# Altium PCB motor.PcbDoc
Units mm, origin at the board's own origin, x right, y up, seen from the top; angles counter-clockwise.
Board outline 85 x 80 mm, 4 copper layers (Top Layer, Gnd, DC Power, Bottom Layer), stack 1.782 mm thick; 124 components, 69 nets, 364 pads, 102 vias.
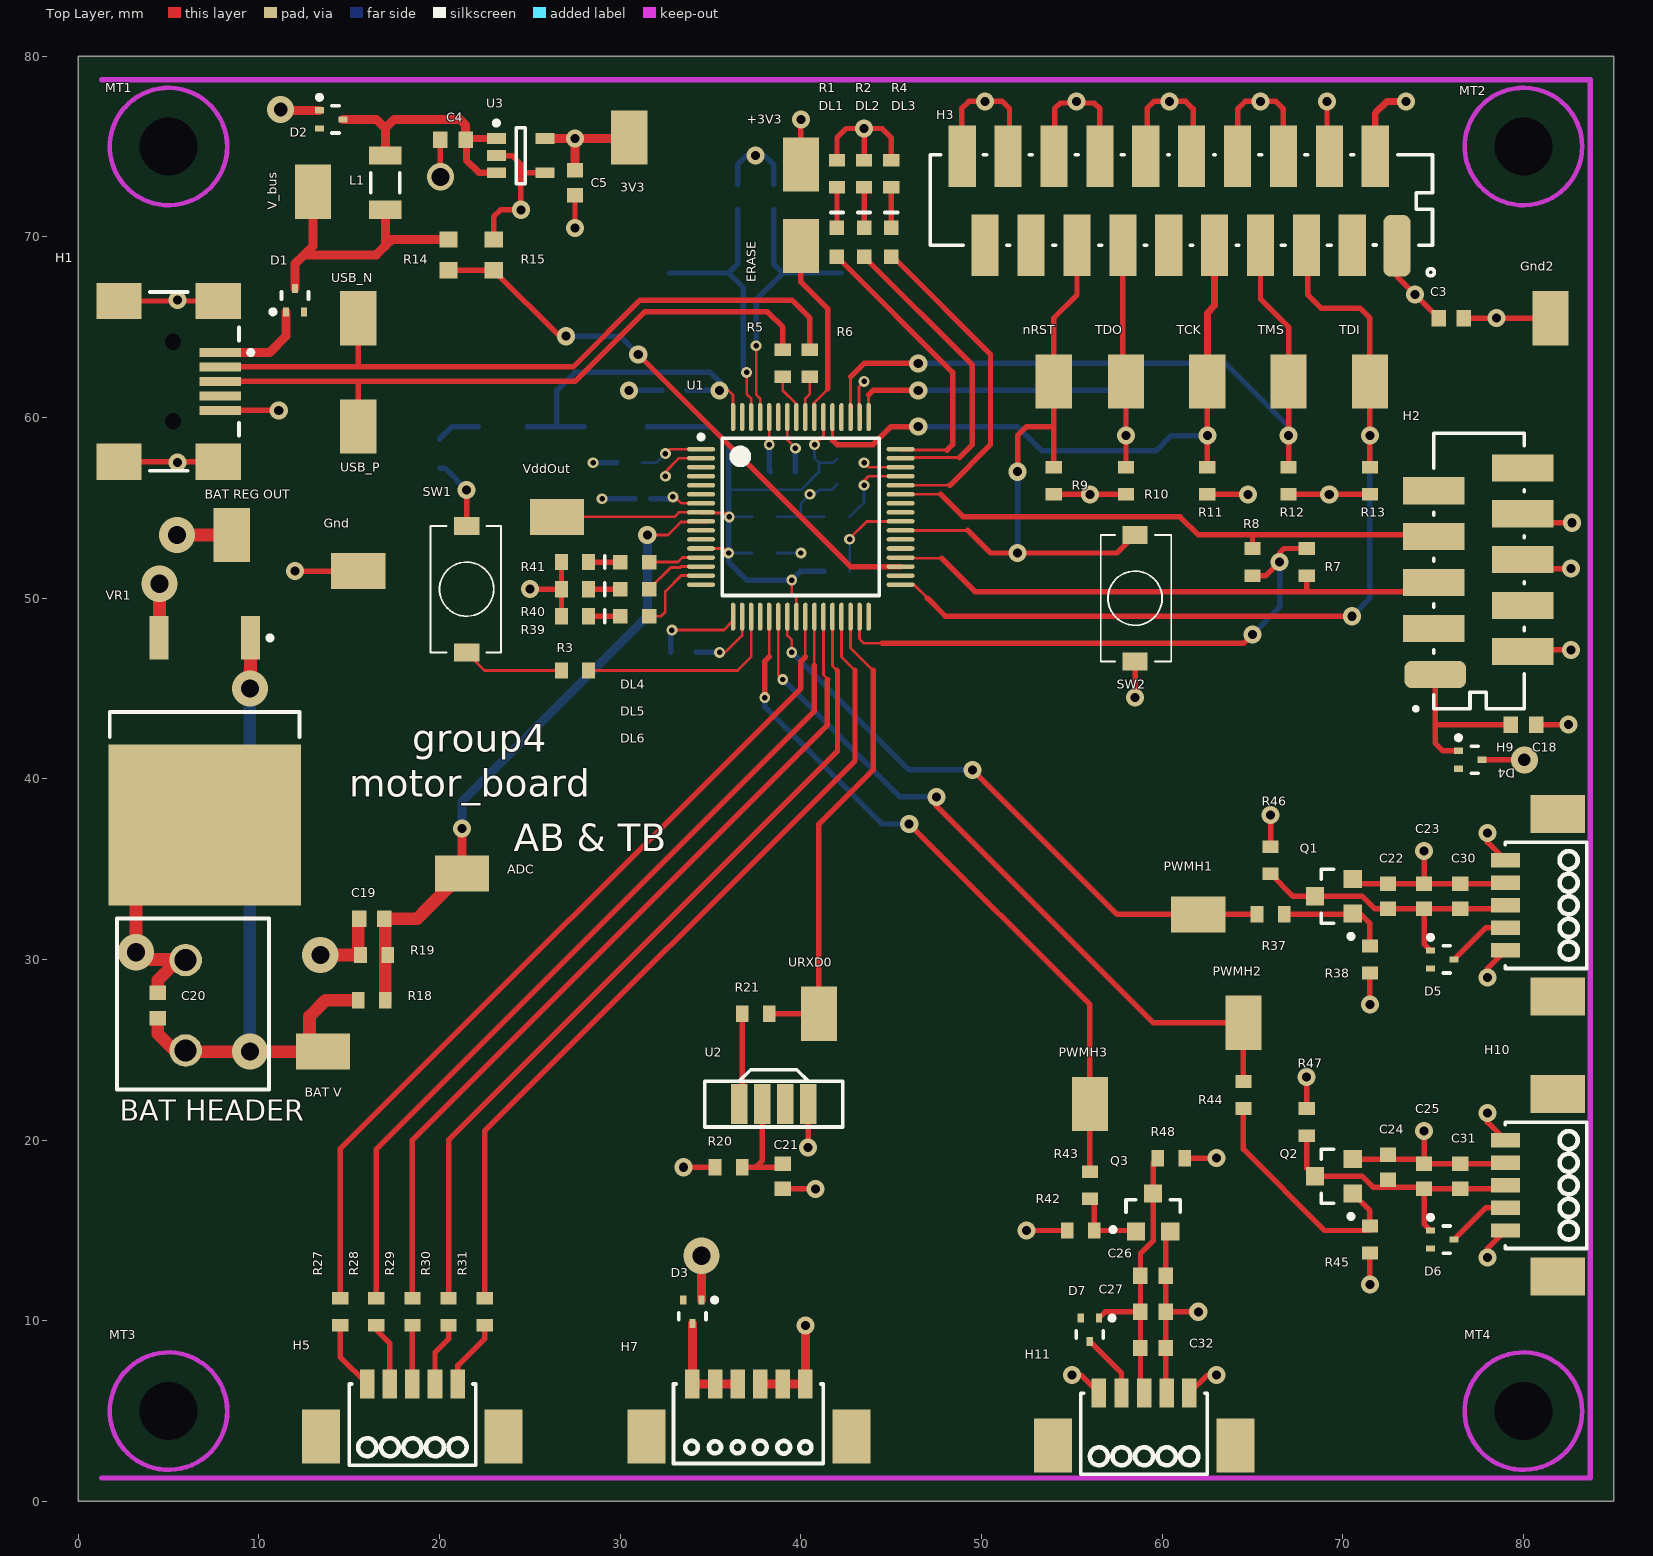
[diagram p0: Top Layer view]
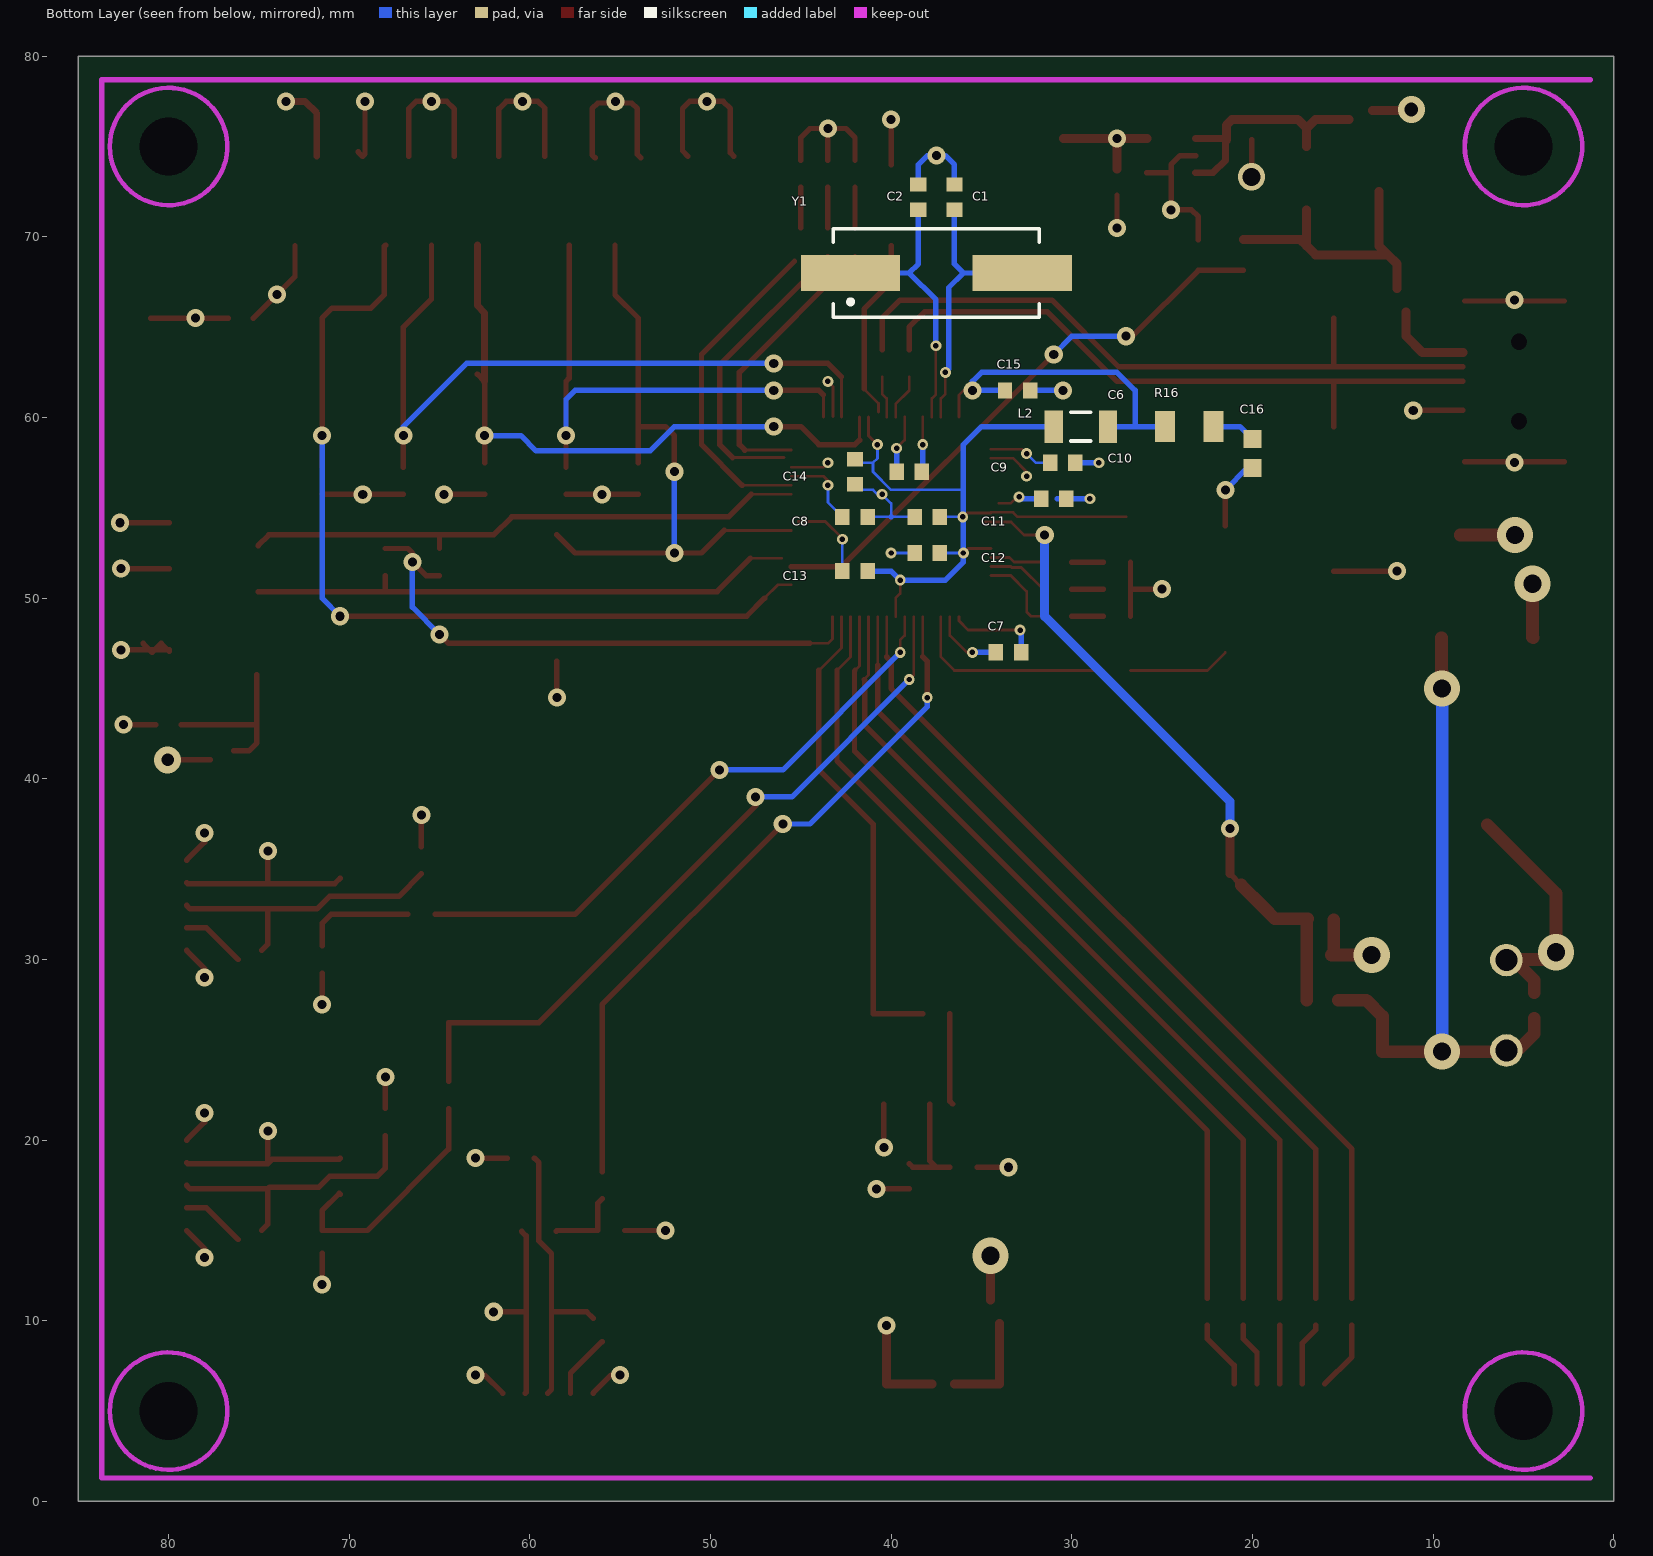
[diagram p1: Bottom Layer view, seen from below]
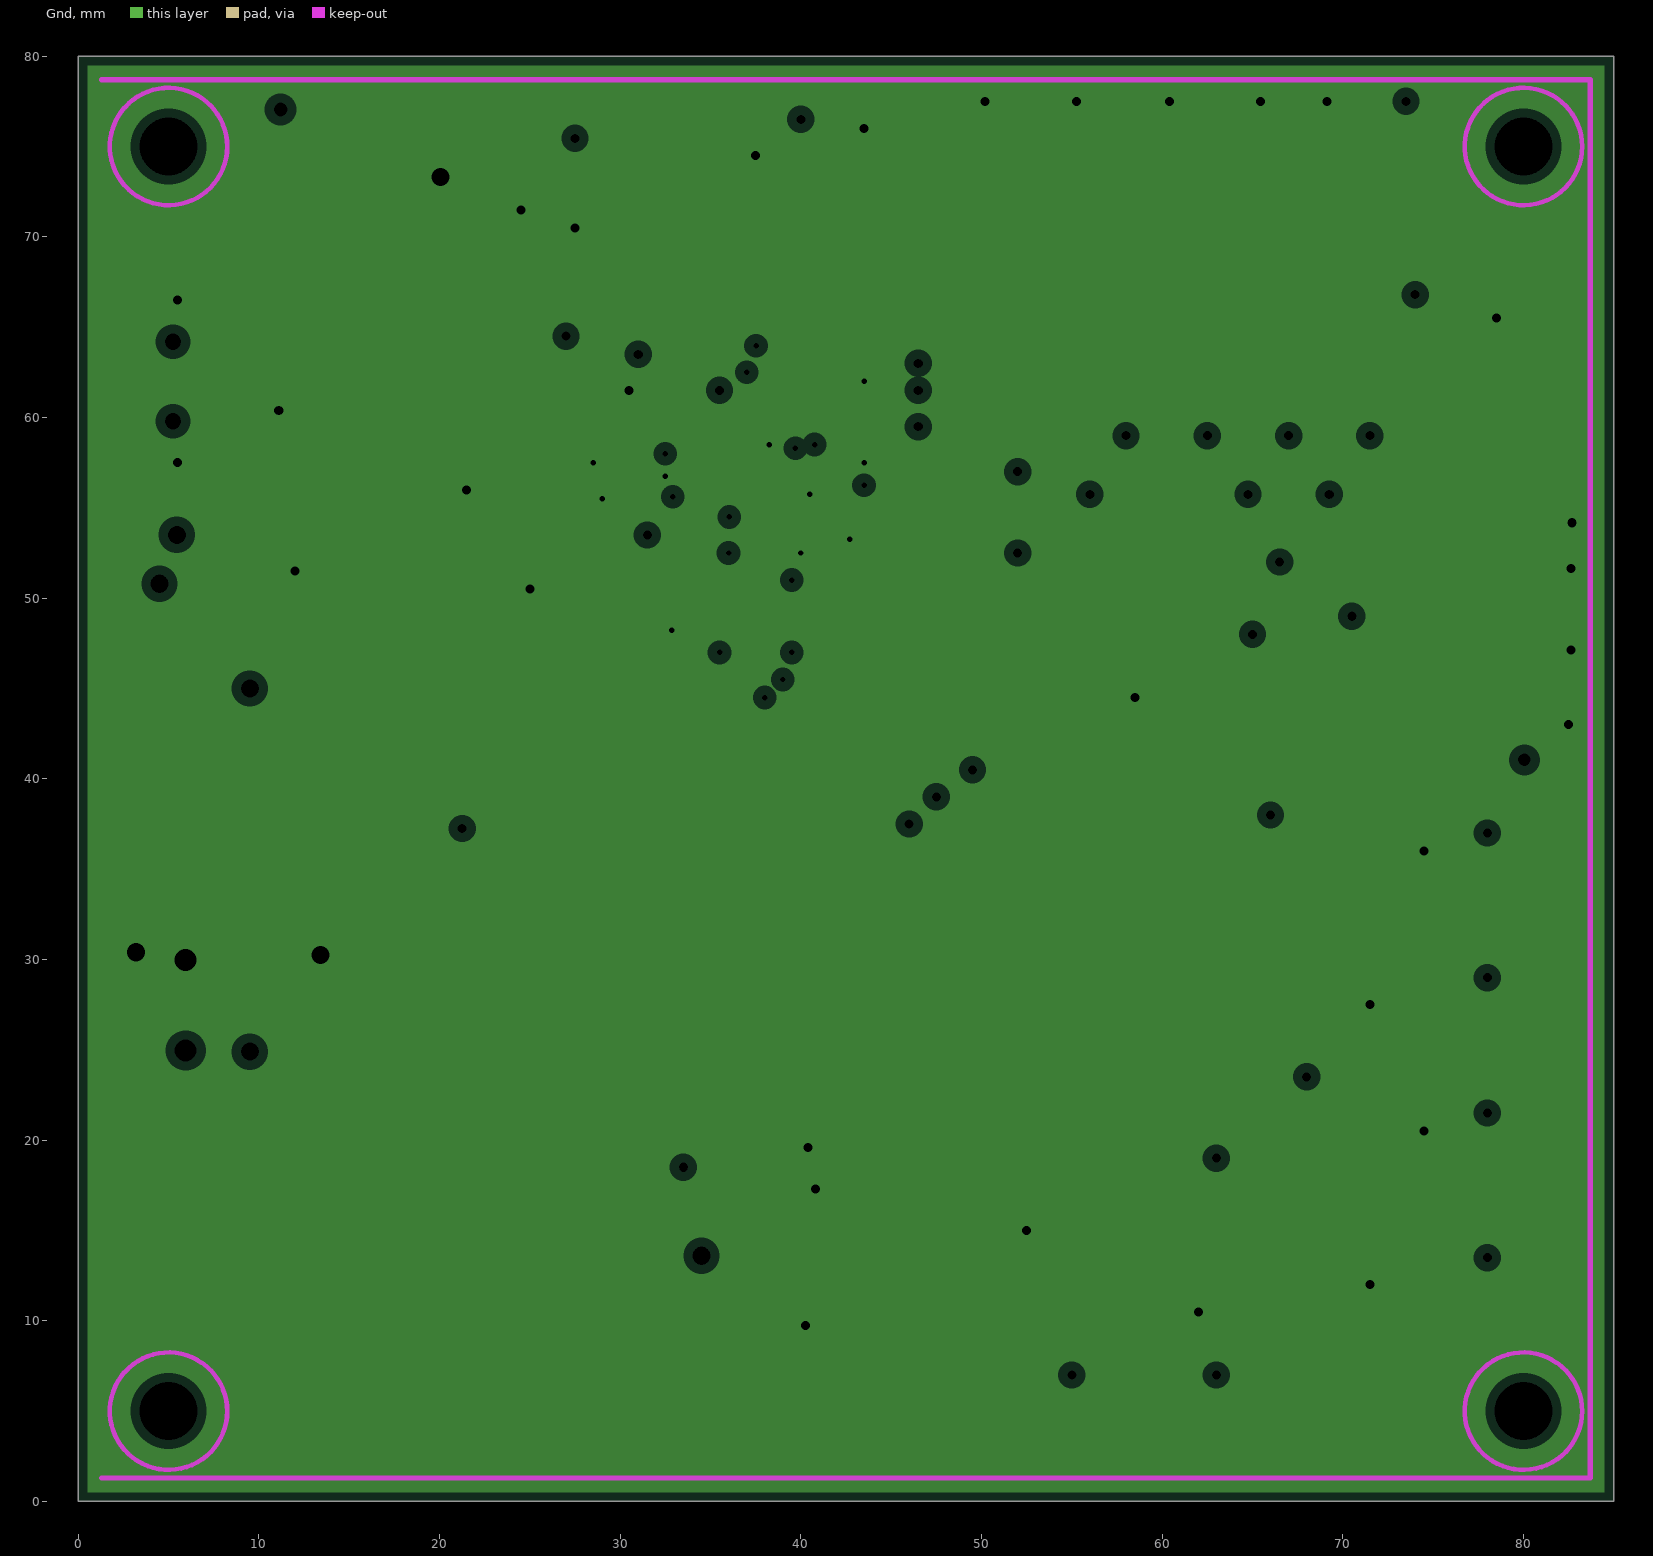
[diagram p2: Gnd, clearances drawn from the general rule]
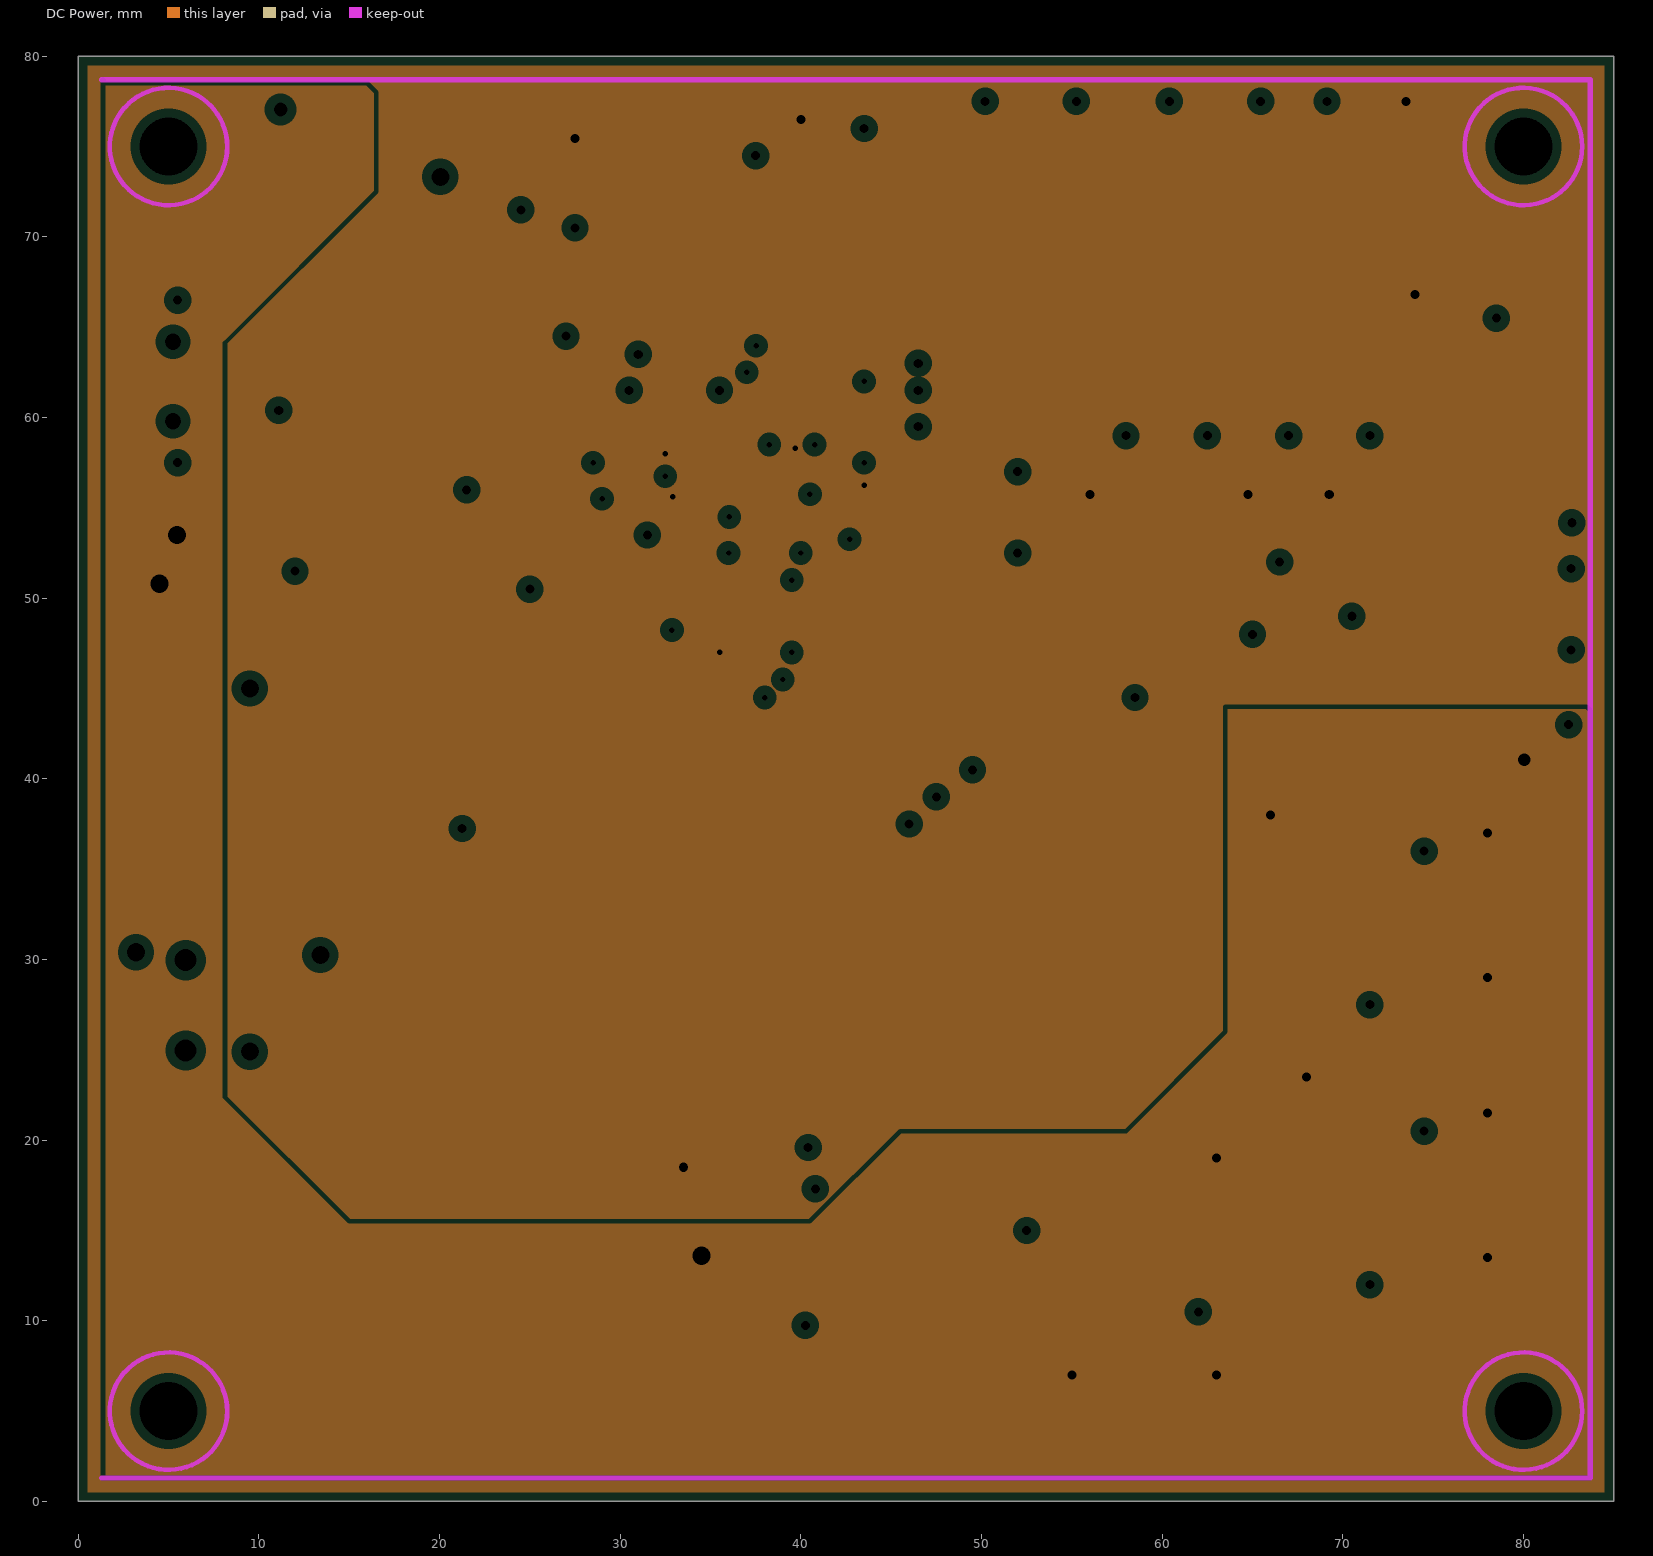
[diagram p3: DC Power, clearances drawn from the general rule]

## Layer stack, top to bottom
Top Solder: solder mask 0.0102, Solder Resist, Dk 3.5
Top Layer: signal copper 0.0356
Dielectric1: prepreg 0.32, FR-4, Dk 4.8
Gnd: plane copper 0.0356
Dielectric2: core 1, FR-4, Dk 4.8
DC Power: plane copper 0.0356
Dielectric3: prepreg 0.32, FR-4, Dk 4.8
Bottom Layer: signal copper 0.0356
Bottom Solder: solder mask 0.0102, Solder Resist, Dk 3.5

## Board outline
0,0 85,0 85,80 0,80

## Design rules (kind name [scope] priority, off if disabled: settings)
Clearance Min_Clearance_Circuit_Labs [All] p1: gap=0.15
DiffPairsRouting [All] p1: maxlimit=0.254 minlimit=0.254 mostfreqgap=0.254 toplayer_minwidth=0.381 toplayer_maxwidth=0.381 toplayer_prefwidth=0.381 bottomlayer_minwidth=0.381 bottomlayer_maxwidth=0.381 bottomlayer_prefwidth=0.381 maxuncoupledlength=12.7
FanoutControl Fanout_BGA [IsBGA] p1 off: bgadir=Out bgaviamode=Centered fanoutstyle=Auto fanoutdirection=Alternating viagrid=0.025 // Fanout_BGA (Default Rule)
HoleSize [All] p1: absolutevalues=TRUE maxlimit=10 minlimit=0.3 maxpercent=80.000 minpercent=20.000
MinimumAnnularRing [All] p1: minimumring=0.1
MinimumSolderMaskSliver [All] p1: minsoldermaskwidth=0.25
NetAntennae [All] p1: netantennaetolerance=1
PasteMaskExpansion [All] p1 off: expansion=0.2
PlaneClearance [All] p1: clearance=0.508
PlaneConnect [All] p1: planeconnectstyle=Relief reliefexpansion=0.508 reliefentries=4 reliefconductorwidth=0.254 reliefairgap=0.254
PolygonConnect [All] p1: connectstyle=Relief reliefconductorwidth=0.254 reliefentries=4 polygonreliefangle="90 Angle" airgapwidth=0.254
RoutingVias [All] p1: holewidth=0.5 width=1 viastyle="Through Hole" minholewidth=0.3 minwidth=0.6 maxholewidth=1 maxwidth=2
SMDNeckDown [All] p1 off: percent=50.000
SMDToCorner [All] p1: distance=98425
SMDToPlane [All] p1: distance=1968504
SilkToSolderMaskClearance SilkscreenOverComponentPads [IsPad] p1: minsilkscreentomaskgap=0.254 clearancetoexposedcopper=TRUE
SolderMaskExpansion [All] p1: expansion=0.102
ViasUnderSMD [All] p1: allowed=FALSE
Width [All] p1: maxlimit=2 minlimit=0.15 preferedwidth=0.3
21 further rules are at their usual default settings.

## Classes and differential pairs
net class R48_Nets: +5V NetC26_2
net class R47_Nets: +5V NetC24_2
net class R46_Nets: +5V NetC22_2
net class Y1_Nets: NetC1_2 NetC2_2
net class VR1_Nets: +5V "BAT V" GND
net class USB_P_Nets: USB_P
net class USB_N_Nets: USB_N
net class URXD0_Nets: URXD0
net class U3_Nets: +3V3 GND NetC4_1
net class U2_Nets: GND NetC21_2 NetR21_2 NetU2_2
net class U1_Nets: +3V3 "BATTERY ADC" ERASE GND LED1 LED2 LED3 LED4 LED5 LED6 NetC1_2 NetC2_2 NetC15_2 NetR3_1 NetR5_2 NetR6_2 NetR7_2 NetU1_3 NetU1_5 NetU1_10 NetU1_11 NetU1_16 NetU1_32 NetU1_34 NetU1_37 NetU1_38 NetU1_41 NetU1_42 NetU1_59 NRST P25 P26 P27 P28 P29 PWMH1 PWMH2 PWMH3 SCL SDA TCK TDI TDO TMS URXD0 "USB DETECT" VDDOUT
net class Gnd_Nets: GND
net class Gnd2_Nets: GND
net class VddOut_Nets: VDDOUT
net class 3V3_Nets: +3V3
net class V_bus_Nets: VBUS
net class TMS_Nets: TMS
net class TDO_Nets: TDO
net class TDI_Nets: TDI
net class TCK_Nets: TCK
net class SW2_Nets: GND NRST
net class SW1_Nets: GND NetR3_2
net class R45_Nets: GND NetQ2_1
net class R44_Nets: NetQ2_1 PWMH2
net class R43_Nets: NetQ3_1 PWMH3
net class R42_Nets: GND NetQ3_1
net class R41_Nets: GND NetDL4_1
net class R40_Nets: GND NetDL5_1
net class R39_Nets: GND NetDL6_1
net class R38_Nets: GND NetQ1_1
net class R37_Nets: NetQ1_1 PWMH1
net class R31_Nets: NetH5_5 P29
net class R30_Nets: NetH5_4 P28
net class R29_Nets: NetH5_3 P27
net class R28_Nets: NetH5_2 P26
net class R27_Nets: NetH5_1 P25
net class R21_Nets: NetR21_2 URXD0
net class R20_Nets: +3V3 NetC21_2
net class R19_Nets: "BATTERY ADC" GND
net class R18_Nets: "BAT V" "BATTERY ADC"
net class R16_Nets: NetC15_2 NetC16_2
net class R15_Nets: GND "USB DETECT"
net class R14_Nets: "USB DETECT" VBUS
net class R13_Nets: +3V3 TDI
net class R12_Nets: +3V3 TMS
net class R11_Nets: +3V3 TCK
net class R10_Nets: +3V3 TDO
net class R9_Nets: +3V3 NRST
net class R8_Nets: NetR7_2 SDA
net class R7_Nets: NetR7_2 SCL
net class R6_Nets: NetR6_2 USB_N
net class R5_Nets: NetR5_2 USB_P
net class R4_Nets: GND NetDL3_1
net class R3_Nets: NetR3_1 NetR3_2
net class R2_Nets: GND NetDL2_1
net class R1_Nets: GND NetDL1_1
net class Q3_Nets: GND NetC26_2 NetQ3_1
net class Q2_Nets: GND NetC24_2 NetQ2_1
net class Q1_Nets: GND NetC22_2 NetQ1_1
net class PWMH3_Nets: PWMH3
net class PWMH1_Nets: PWMH1
net class nRST_Nets: NRST
net class L2_Nets: NetC15_2 VDDOUT
net class L1_Nets: NetC4_1 VBUS
net class H11_Nets: +5V GND NetC26_2 NetD7_3
net class H10_Nets: +5V GND NetC24_2 NetD6_3
net class H9_Nets: +5V GND NetC22_2 NetD5_3
net class H7_Nets: GND NetD3_3
net class H5_Nets: NetH5_1 NetH5_2 NetH5_3 NetH5_4 NetH5_5
net class H4_Nets: "BAT V" GND
net class H3_Nets: +3V3 GND NetH3_3 NetH3_11 NetH3_17 NetH3_19 NRST TCK TDI TDO TMS
net class H2_Nets: GND NetC18_2 NetH2_3 NetH2_4 NetH2_9 NetH2_10 SCL SDA
net class H1_Nets: GND NetD1_1 NetH1_4 USB_N USB_P
net class ERASE_Nets: ERASE
net class DL6_Nets: LED6 NetDL6_1
net class DL5_Nets: LED5 NetDL5_1
net class DL4_Nets: LED4 NetDL4_1
net class DL3_Nets: LED3 NetDL3_1
net class DL2_Nets: LED2 NetDL2_1
net class DL1_Nets: LED1 NetDL1_1
net class D7_Nets: NetC26_2 NetD7_3
net class D6_Nets: NetC24_2 NetD6_3
net class D5_Nets: NetC22_2 NetD5_3
net class D4_Nets: +5V NetC18_2
net class D3_Nets: +5V NetD3_3
net class D2_Nets: 5V NetC4_1
net class D1_Nets: NetD1_1 VBUS
net class C32_Nets: GND NetC26_2
net class C31_Nets: GND NetC24_2
net class C30_Nets: GND NetC22_2
net class C27_Nets: GND NetC26_2
net class C26_Nets: GND NetC26_2
net class C25_Nets: GND NetC24_2
net class C24_Nets: GND NetC24_2
net class C23_Nets: GND NetC22_2
net class C22_Nets: GND NetC22_2
net class C21_Nets: GND NetC21_2
net class C20_Nets: "BAT V" GND
net class C19_Nets: "BATTERY ADC" GND
net class C18_Nets: GND NetC18_2
net class C16_Nets: GND NetC16_2
net class C15_Nets: GND NetC15_2
net class C14_Nets: GND VDDOUT
net class C13_Nets: GND VDDOUT
net class C12_Nets: GND VDDOUT
net class C11_Nets: GND VDDOUT
net class C10_Nets: +3V3 GND
net class C9_Nets: +3V3 GND
net class C8_Nets: +3V3 GND
net class C7_Nets: +3V3 GND
net class C6_Nets: +3V3 GND
net class C5_Nets: +3V3 GND
net class C4_Nets: GND NetC4_1
net class C3_Nets: +3V3 GND
net class C2_Nets: GND NetC2_2
net class C1_Nets: GND NetC1_2
net class "BAT V_Nets": "BAT V"
net class "BAT REG OUT_Nets": +5V
net class +3V3_Nets: +3V3
component class "Motor Board PWM": C22 C23 C24 C25 C26 C27 C30 C31 C32 D5 D6 D7 DL4 DL5 DL6 H9 H10 H11 PWMH1 PWMH2 PWMH3 Q1 Q2 Q3 R37 R38 R39 R40 R41 R42 R43 R44 R45 R46 R47 R48
component class "Motor Board Power": 3V3 C4 C5 C6 C7 C8 C9 C10 C11 C12 C13 C14 C15 C16 D2 Gnd Gnd2 L1 L2 R16 U3 V_bus VddOut
component class "Motor Board Main": +3V3 C1 C2 C3 C18 D1 D4 DL1 DL2 DL3 ERASE H1 H2 H3 MT1 MT2 MT3 MT4 nRST R1 R2 R3 R4 R5 R6 R7 R8 R9 R10 R11 R12 R13 R14 R15 SW1 SW2 TCK TDI TDO TMS U1 USB_N USB_P Y1
component class "Motor Board Extras": ADC "BAT REG OUT" "BAT V" C19 C20 C21 D3 H5 H7 R18 R19 R20 R21 R27 R28 R29 R30 R31 U2 URXD0 VR1
net class ADC_Nets: "BATTERY ADC"
net class PWMH2_Nets: PWMH2
differential pair USB: +USB_P -USB_N

## Components (designator, comment, footprint, x,y, rotation, side; value= is the part's Value field where it differs from the comment)
3V3 "3V3" TP_0805 30.5,75.5 r90 top
+3V3 "3V3" TP_0805 40,74 r90 top
ADC "TP5" TP_0805 21.25,34.75 r0 top
"BAT REG OUT" "TP7" TP_0805 8.5,53.5 r90 top
"BAT V" "TP6" TP_0805 13.55,24.9 r180 top
C1 "10pF" CAPC1608L 36.5,72.2 r270 bottom
C2 "10pF" CAPC1608L 38.5,72.2 r270 bottom
C3 "100nF" CAPC1608L 76,65.5 r180 top
C4 "10uF" CAPC1608L 20.75,75.375 r180 top
C5 "10uF" CAPC1608L 27.5,73 r270 top
C6 "100nF" CAPC1608L 30.5,57.5 r0 bottom
C7 "100nF" CAPC1608L 33.5,47 r0 bottom
C8 "100nF" CAPC1608L 42,54.5 r0 bottom
C9 "100nF" CAPC1608L 39,57 r0 bottom
C10 "100nF" CAPC1608L 31,55.5 r0 bottom
C11 "100nF" CAPC1608L 38,54.5 r180 bottom
C12 "100nF" CAPC1608L 38,52.5 r180 bottom
C13 "100nF" CAPC1608L 42,51.5 r180 bottom
C14 "100nF" CAPC1608L 42,57 r90 bottom
C15 "100nF" CAPC1608L 33,61.5 r0 bottom
C16 "4.7uF" CAPC1608N 20,58 r90 bottom
C18 "100nF" CAPC1608L 80,43 r180 top
C19 "1nF" CAPC1608L 16.25,32.25 r0 top
C20 "100nF" CAPC1608L 4.4,27.45 r270 top
C21 "100nF" CAPC1608L 39,18 r90 top
C22 "100nF" CAPC1608L 72.5,33.5 r270 top
C23 "10nF" CAPC1608L 74.5,33.5 r270 top
C24 "100nF" CAPC1608L 72.5,18.5 r270 top
C25 "10nF" CAPC1608L 74.5,18 r270 top
C26 "100nF" CAPC1608L 59.5,12.5 r180 top
C27 "10nF" CAPC1608L 59.5,10.5 r180 top
C30 "1nF" CAPC1608L 76.5,33.5 r270 top
C31 "1nF" CAPC1608L 76.5,18 r270 top
C32 "1nF" CAPC1608L 59.5,8.5 r180 top
D1 "BAS16TT1G" SOT416 12,66.5 r0 top
D2 "BAS16TT1G" SOT416 14,76.5 r270 top
D3 "BAS16TT1G" SOT416 34,10.5 r180 top
D4 "BAS16TT1G" SOT416 77.05,41.05 r270 top
D5 "BAS16TT1G" SOT416 75.5,30 r270 top
D6 "BAS16TT1G" SOT416 75.5,14.5 r270 top
D7 "BAS16TT1G" SOT416 56,9.5 r180 top
DL1 "#NAME?" WL-SMCW0603 42,70.5 r270 top
DL2 "#NAME?" WL-SMCW0603 43.5,70.5 r270 top
DL3 "#NAME?" WL-SMCW0603 45,70.5 r270 top
DL4 "#NAME?" WL-SMCW0603 30,52 r0 top
DL5 "#NAME?" WL-SMCW0603 30,50.5 r0 top
DL6 "#NAME?" WL-SMCW0603 30,49 r0 top
ERASE "Erase" TP_0805 40,69.5 r90 top
Gnd "Gnd" TP_0805 15.5,51.5 r0 top
Gnd2 "Gnd" TP_0805 81.5,65.5 r90 top
H1 "JS_USB_MINI_B" USB/SM0.8-6H5 0,62 r180 top
H2 "I2C" 188275-10 77.5,51.5 r90 top
H3 "ARM JTAG" 188275-20 61,72 r180 top
H5 "SMD Vert 1.25mm" SD-53398-0519 16,6.5 r180 top
H7 "SMD Vert 1.25mm" SD-53398-0619 34,6.5 r180 top
H9 "SMD Horiz 1.25mm" SD-53398-0519 79,30.5 r270 top
H10 "SMD Horiz 1.25mm" SD-53398-0519 79,15 r270 top
H11 "SMD Horiz 1.25mm" SD-53398-0519 56.5,6 r180 top
L1 "Ferrite Bead" INDC3216L 17,73 r90 top
L2 "Ferrite Bead" INDC3216L 29.5,59.5 r0 bottom
MT1 "M3.2 NPTH" MNT-HOLE_3.2mm_NPTH 5,75 r0 top
MT2 "M3.2 NPTH" MNT-HOLE_3.2mm_NPTH 80,75 r0 top
MT3 "M3.2 NPTH" MNT-HOLE_3.2mm_NPTH 5,5 r0 top
MT4 "M3.2 NPTH" MNT-HOLE_3.2mm_NPTH 80,5 r0 top
nRST "nRST" TP_0805 54,62 r90 top
PWMH1 "TP4" TP_0805 62,32.5 r0 top
PWMH2 "TP2" TP_0805 64.5,26.5 r270 top
PWMH3 "TP3" TP_0805 56,22 r90 top
Q1 "#NAME?" SOT23-3N 69.5,33.5 r180 top
Q2 "#NAME?" SOT23-3N 69.5,18 r180 top
Q3 "#NAME?" SOT23-3N 59.5,16 r90 top
R1 "62R" RESC1608L 42,73.5 r90 top
R2 "220R" RESC1608L 43.5,73.5 r90 top
R3 "2K2" RESC1608L 27.5,46 r180 top
R4 "470R" RESC1608L 45,73.5 r90 top
R5 "27R" RESC1608L 39,63 r270 top
R6 "27R" RESC1608L 40.5,63 r270 top
R7 "2K2" RESC1608L 68,52 r90 top
R8 "2K2" RESC1608L 65,52 r270 top
R9 "100K" RESC1608L 54,56.5 r270 top
R10 "100K" RESC1608L 58,56.5 r270 top
R11 "100K" RESC1608L 62.5,56.5 r270 top
R12 "100K" RESC1608L 67,56.5 r270 top
R13 "100K" RESC1608L 71.5,56.5 r270 top
R14 "27K" RESC1608N 20.5,69 r90 top
R15 "47K" RESC1608N 23,69 r270 top
R16 "1R" RESC3216L 23.5,59.5 r0 bottom
R18 "1K1" RESC1608L 16.25,27.75 r180 top
R19 "2K7" RESC1608L 16.375,30.25 r0 top
R20 "47R" RESC1608L 36,18.5 r0 top
R21 "27K" RESC1608L 37.5,27 r180 top
R27 "2K2" RESC1608L 14.5,10.5 r270 top
R28 "2K2" RESC1608L 16.5,10.5 r270 top
R29 "2K2" RESC1608L 18.5,10.5 r270 top
R30 "2K2" RESC1608L 20.5,10.5 r270 top
R31 "2K2" RESC1608L 22.5,10.5 r270 top
R37 "2K2" RESC1608L 66,32.5 r0 top
R38 "10K" RESC1608L 71.5,30 r90 top
R39 "62R" RESC1608L 27.5,49 r180 top
R40 "220R" RESC1608L 27.5,50.5 r180 top
R41 "470R" RESC1608L 27.5,52 r180 top
R42 "10K" RESC1608L 55.5,15 r0 top
R43 "2K2" RESC1608L 56,17.5 r270 top
R44 "2K2" RESC1608L 64.5,22.5 r270 top
R45 "10K" RESC1608L 71.5,14.5 r270 top
R46 "2K2" RESC1608L 66,35.5 r270 top
R47 "2K2" RESC1608L 68,21 r90 top
R48 "2K2" RESC1608L 60.5,19 r0 top
SW1 "Sleep/Wake Up" KSR211G 21.5,47 r90 top
SW2 "Reset" KSR211G 58.5,53.5 r270 top
TCK "TCK" TP_0805 62.5,62 r90 top
TDI "TDI" TP_0805 71.5,62 r90 top
TDO "TDO" TP_0805 58,62 r90 top
TMS "TMS" TP_0805 67,62 r90 top
U1 "ATSAM4S8BA-ANR" LQFP64_L 40,54.5 r0 top
U2 "TSOP6136TR" TSOP61 38.5,22 r180 top
U3 "#NAME?" SOT95P280X145-5N 24.5,74.5 r0 top
URXD0 "TP1" TP_0805 41,27 r90 top
USB_N "USB_N" TP_0805 15.5,65.5 r90 top
USB_P "USB_P" TP_0805 15.5,59.5 r90 top
V_bus "V_Bus" TP_0805 13,72.5 r90 top
VddOut "VddOut" TP_0805 26.5,54.5 r0 top
VR1 "L7805CD2T-TR" D2PAK_N 7,41 r270 top
Y1 "12MHz" HC49/4h_SMX 37.5,68 r180 bottom

## Footprints (in the part's own frame and the unit in brackets; to place one, negate y for a bottom-side part, rotate by r counter-clockwise, add the part's x,y. Pads: shape width x height; smd on the part's side, far side on the other; paste and mask are expansions set on the pad)
188275-10 [mm] "MicroMatch Ribbon Connector 10 way"
  rrect50% 1.5x3.4 smd: 1(-5.724,2.385)
  rect 1.5x3.4 smd: 2(-4.445,-2.461) 3(-3.175,2.461) 4(-1.905,-2.461) 5(-0.635,2.461) 6(0.635,-2.461) 7(1.905,2.461) 8(3.175,-2.461) 9(4.445,2.461) 10(5.715,-2.461)
  silkscreen extent -7.74,-2.55 7.62,3.57, body extent -7.62,-2.5 7.64,2.43, height 8.45
188275-20 [mm] "MicroMatch Ribbon Connector 20 way"
  rrect50% 1.5x3.4 smd: 1(-12,2.5)
  rect 1.5x3.4 smd: 2(-10.795,-2.461) 3(-9.525,2.461) 4(-8.255,-2.461) 5(-6.985,2.461) 6(-5.715,-2.461) 7(-4.445,2.461) 8(-3.175,-2.461) 9(-1.905,2.461) 10(-0.635,-2.461) 11(0.635,2.461) 12(1.905,-2.461) 13(3.175,2.461) 14(4.445,-2.461) 15(5.715,2.461) 16(6.985,-2.461) 17(8.255,2.461) 18(9.525,-2.461) 19(10.795,2.461) 20(12.065,-2.461)
  silkscreen extent -14.06,-2.54 13.83,4.16, body extent -13.96,-2.54 13.93,2.46, height 8.45
CAPC1608L [mm] "Chip Capacitor, Body 1.6x0.8mm, IPC High Density"
  rect 0.8x0.9 smd: 1(-0.7,0) 2(0.7,0)
  body extent -0.87,-0.48 0.87,0.48, height 0.85
CAPC1608N [mm] "Chip Capacitor, Body 1.6x0.8mm, IPC Medium Density"
  rect 1x1 smd: 1(-0.8,0) 2(0.8,0)
  body extent -0.87,-0.48 0.87,0.48, height 0.85
D2PAK_N [mm] "D2-PAK, 4-Leads, Body 8.8x10.4mm, Pitch 2.54mm, Lead Span 15.1mm, IPC Medium Density"
  rect 2.4x1.05 smd: 1(-6.8,2.54) 3(-6.8,-2.54)
  rect 8.9x10.65 smd: 2(3.55,0)
  silkscreen extent -6.92,-5.25 -1.3,5.25, body extent -2.7,-5.28 6.3,5.28, height 4.69
HC49/4h_SMX [mm] "Quartz Crystal, SM; Body 13.4 (inc. leads) x 4.9 mm (LxW max)"
  rect 5.5x2 smd: 1(-4.75,0) 2(4.75,0)
  silkscreen extent -5.7,-2.45 5.7,2.45, body extent -5.61,-2.35 5.56,2.35, height 4
INDC3216L [mm] "Chip Inductor, Body 3.2x1.6mm, IPC High Density"
  rect 1x1.8 smd: 1(-1.5,0) 2(1.5,0)
  silkscreen extent -0.55,-0.8 0.55,0.8, body extent -1.75,-0.95 1.75,0.95, height 1.9
KSR211G [mm] "Subminature Tactile Switch in SMT"
  rect 1x1.4 smd: 1(0,0) 2(7,0)
  silkscreen extent 0,-1.9 7,2, body extent 0,-1.9 7,2, height 4.25
LQFP64_L [mm] "Thin QFP, 64-Leads, Body 10x10mm, Pitch 0.5mm, IPC High Density"
  oval 1.55x0.25 smd mask+0.07: 1(-5.525,3.75) 2(-5.525,3.25) 3(-5.525,2.75) 4(-5.525,2.25) 5(-5.525,1.75) 6(-5.525,1.25) 7(-5.525,0.75) 8(-5.525,0.25) 9(-5.525,-0.25) 10(-5.525,-0.75) 11(-5.525,-1.25) 12(-5.525,-1.75) 13(-5.525,-2.25) 14(-5.525,-2.75) 15(-5.525,-3.25) 16(-5.525,-3.75) 33(5.525,-3.75) 34(5.525,-3.25) 35(5.525,-2.75) 36(5.525,-2.25) 37(5.525,-1.75) 38(5.525,-1.25) 39(5.525,-0.75) 40(5.525,-0.25) 41(5.525,0.25) 42(5.525,0.75) 43(5.525,1.25) 44(5.525,1.75) 45(5.525,2.25) 46(5.525,2.75) 47(5.525,3.25) 48(5.525,3.75)
  oval 0.25x1.55 smd mask+0.07: 17(-3.75,-5.525) 18(-3.25,-5.525) 19(-2.75,-5.525) 20(-2.25,-5.525) 21(-1.75,-5.525) 22(-1.25,-5.525) 23(-0.75,-5.525) 24(-0.25,-5.525) 25(0.25,-5.525) 26(0.75,-5.525) 27(1.25,-5.525) 28(1.75,-5.525) 29(2.25,-5.525) 30(2.75,-5.525) 31(3.25,-5.525) 32(3.75,-5.525) 49(3.75,5.525) 50(3.25,5.525) 51(2.75,5.525) 52(2.25,5.525) 53(1.75,5.525) 54(1.25,5.525) 55(0.75,5.525) 56(0.25,5.525) 57(-0.25,5.525) 58(-0.75,5.525) 59(-1.25,5.525) 60(-1.75,5.525) 61(-2.25,5.525) 62(-2.75,5.525) 63(-3.25,5.525) 64(-3.75,5.525)
  silkscreen extent -5.65,-4.35 4.35,4.55, body extent -5,-5 5,5, height 1.6
MNT-HOLE_3.2mm_NPTH [mm] "Mounting Hole 3.2mm non plated"
  round 0 hole 3.2 unplated: 1(0,0)
  Keep-Out Layer circle w0.254: c0,0 r3.25
RESC1608L [mm] "Chip Resistor, Body 1.6x0.8mm, IPC High Density"
  rect 0.7x0.9 smd: 1(-0.75,0) 2(0.75,0)
  body extent -0.85,-0.48 0.85,0.48, height 0.9
RESC1608N [mm] "Chip Resistor, Body 1.6x0.8mm, IPC Medium Density"
  rect 0.9x1 smd: 1(-0.85,0) 2(0.85,0)
  body extent -0.85,-0.48 0.85,0.48, height 0.6
RESC3216L [mm] "Chip Resistor, Body 3.1x1.6mm, IPC High Density"
  rect 1.1x1.7 smd: 1(-1.35,0) 2(1.35,0)
  body extent -1.68,-0.87 1.68,0.87, height 2.54
SD-53398-0519 [mm] "Molex Pico Blade 5 Pos Vert SMD Header"
  rect 0.8x1.6 smd: 1(0,0) 2(-1.25,0)
  rect 0.81x1.6 smd: 3(-2.5,0) 4(-3.75,0) 5(-5,0)
  rect 2.1x3 smd: M(-7.55,2.9) M(2.55,2.9)
  silkscreen extent -6,0 1,4.5, body extent -6.35,0.08 1.4,4.4, height 4.75
SD-53398-0619 [mm] "Molex Pico Blade 6 Pos Vert SMD Header"
  rect 0.8x1.6 smd: 1(0,0) 2(-1.25,0)
  rect 0.81x1.6 smd: 3(-2.5,0) 4(-3.75,0) 5(-5,0) 6(-6.25,0)
  rect 2.1x3 smd: M(-8.8,2.9) M(2.55,2.9)
  silkscreen extent -7.25,0 1.05,4.4, body extent -7.59,0.09 1.46,4.31, height 4.75
SOT23-3N [mm] "SOT23, 3-Leads, Body 2.9x1.3mm, Pitch 0.95mm, Lead Span 2.3mm, IPC Medium Density"
  rect 1x1 smd: 1(-1.05,0.95) 2(-1.05,-0.95) 3(1.05,0)
  silkscreen extent -1.08,-1.5 0.7,2.35, body extent -0.7,-1.5 0.7,1.5, height 1.2
SOT95P280X145-5N [mm] "SOT23, 5-Leads, Body 2.90x2.80mm, Pitch 0.95mm, IPC Medium Density"
  rect 1.05x0.6 smd mask+0.07: 1(-1.35,0.95) 2(-1.35,0) 3(-1.35,-0.95) 4(1.35,-0.95) 5(1.35,0.95)
  silkscreen extent -1.47,-1.55 0.25,1.92, body extent -0.87,-1.52 0.87,1.53, height 1.45
SOT416 [mm] "SOT-416 Leads; Body 1.8 x 1.8 mm, inc. leads (LxW max)"
  rect 0.35x0.5 smd: 1(-0.5,-0.65) 2(0.5,-0.65) 3(0,0.65)
  silkscreen extent -1.35,-0.77 0.75,0.45
TP_0805 [mm] "TestPoint SMD"
  rect 3x2 smd: 1(0,0)
  body extent -1.5,-1 1.5,1.1, height 1.4
TSOP61 [mm]
  rect 0.9x2.2 smd: 1(-1.905,0) 2(-0.635,0) 3(0.635,0) 4(1.905,0)
  silkscreen extent -3.81,-1.9 3.81,1.27, body extent -3.81,-1.27 3.81,1.27, height 5.3
USB/SM0.8-6H5 [mm] "Connector; USB2.0, Type B, SM; 5 Position; Right Angle"
  rect 2.3x0.5 smd mask+0.07: 1(-7.85,-1.6) 2(-7.85,-0.8) 3(-7.85,0) 4(-7.85,0.8) 5(-7.85,1.6)
  rect 2.5x2 smd: 6(-7.75,4.45) 7(-2.25,4.45) 8(-7.75,-4.45) 9(-2.25,-4.45)
  round 0.6 hole 0.9 unplated: MH1(-5.25,2.2) MH2(-5.25,-2.2)
  silkscreen extent -9.68,-4.95 -3.95,4.95, body extent -8.9,-4.95 0.7,4.95, height 3.9
WL-SMCW0603 [mm] "2.4 x 0.8 x 0.7mm LED"
  rect 0.8x0.8 smd: 1(0,0) 2(1.6,0)
  silkscreen extent -0.85,-0.35 -0.85,0.35

## Part data
3V3 +3V3 ADC "BAT REG OUT" "BAT V" ERASE Gnd Gnd2 nRST PWMH1 PWMH2 PWMH3 TCK TDI TDO TMS URXD0 USB_N USB_P V_bus VddOut: library part TP_0805, "Test Point 2.0X0.9X1.2mm SMD"
C1 C2: library part CC_10pF_0603, "CAP CER 10pF COG/NPO 50V 0603"
C3 C6 C7 C8 C9 C10 C11 C12 C13 C14 C15 C18 C20 C21 C22 C24 C26: library part CC_100nF_0603, "CAP CER 100nF X7R +-10% 50V 0603"
C4 C5: library part CC_10uF_0603, "CAP CER 10UF X5R +-20% 10V 0603"
C16: library part CC_4.7uF_0603, "CAP CER 4.7uF X5R +-20%  10V 0603"
C19 C30 C31 C32: library part CC_1nF_0603, "CAP CER 1nF X7R +-10% 50V 0603"
C23 C25 C27: library part CC_10nF_0603, "CAP CER 10nF X7R +-10% 50V 0603"
D1 D2 D3 D4 D5 D6 D7: library part DR_BAS16TT1G, "Diode Switching, Vr 75V, 200mA, SOT-416"
DL1 DL6: library part DL_150060GS75000, "LED Dk Green 430mcd 0603 SMD"
DL2: library part DL_150060YS75000, "LED Yellow 120mcd 0603 SMD"
DL3 DL4: library part DL_150060RS75000, "LED Red 250mcd 0603 SMD"
DL5: library part DL_150060BS75000, "LED Blue 270mcd 0603 SMD"
H1: library part JS_USB_MINI_B_SMT, "USB 2.0, Right Angle, SMT, B Type, Receptacle, 5 Position,"
H2: library part JB_HDR_IDC_5X2_VERT, "IDC Header, 1,27mm, 10-Pin, Vert, SMT"
H3: library part JB_HDR_IDC_10X2_VERT, "IDC Header, 1,27mm, 20-Pin, Vert, SMT"
H5: library part JB_53398-05, "Header_Vert_5Pos_1.25mm_125V@1A_SMT"
H7: library part JB_53398-06, "Header_Vert_6Pos_1.25mm_125V@1A_SMT"
H9 H10 H11: library part JB_53261-05, "Header_Horiz_5Pos_1.25mm_125V@1A_SMT"
L1 L2: library part IN_Ferrite-Bead, "Ferrite Bead, Rdc 0.3R, Z100MHZ 600R, Imax 1A, SMD 1206"
MT1 MT2 MT3 MT4: library part MC_M3.2_HOLE, "Fixing M3.2 Mount Hole NPTH"
Q1 Q2 Q3: library part TF_DMN3404L-7, "DIODES INC. - DMN3404L-7 - MOSFET,N CH,30V,5.8A,SOT-23"
R1 R39: library part RS_62R, "RES 62 OHM 1/10W 5% 0603 SMD"
R2 R40: library part RS_220R, "RES 220 OHM 1/10W 5% 0603 SMD"
R3 R7 R8 R27 R28 R29 R30 R31 R37 R43 R44 R46 R47 R48: library part RS_2K2, "RES 2.2K OHM 1/10W 5% 0603 SMD"
R4 R41: library part RS_470R, "RES 470 OHM 1/10W 5% 0603 SMD"
R5 R6: library part RS_27R, "RES 27 OHM 1/10W 5% 0603 SMD"
R9 R10 R11 R12 R13: library part RS_100K, "RES 100K OHM 1/10W 5% 0603 SMD"
R14 R21: library part RS_27K, "RES 27K OHM 1/10W 5% 0603 SMD"
R15: library part RS_47K, "RES 47.0K OHM 1/10W 5% 0603 SMD"
R16: library part RT_1R, "RES 1R OHM 1/4W 5% 1206 SMD"
R18: library part RS_1K1, "RES 1.1K OHM 1/10W 5% 0603 SMD"
R19: library part RS_2K7, "RES 2.7K OHM 1/10W 5% 0603 SMD"
R20: library part RS_47R, "RES 47 OHM 1/10W 5% 0603 SMD"
R38 R42 R45: library part RS_10K, "RES 10.0K OHM 1/10W 5% 0603 SMD"
SW1 SW2: library part "WS_KSR211G LFS", "SWITCH TACTILE SPST-NO SMD"
U1: library part SE_ATSAM4S16BA-MU, "IC MCU 32BIT 512KB FLASH 64LQFP"
U2: "Infrared Receiver 36KHz"
U3: library part SV_TLV70233DBVR, "IC REG LDO 3.3V 0.3A SOT23-5"
VR1: library part "Volt Reg", "Voltage Regulator"
Y1: library part XT_CRYSTAL_12MHz, "12.00 MHZ 18PF HC49/4H SMD"

## Free pads (board coordinates)
  round 1.803 hole 1.219: 1(5.945,29.967) 2(5.945,24.964)

## Via types
v1: diameter 1, hole 0.5, Top Layer to Bottom Layer, 66 vias
v2: diameter 0.6, hole 0.3, Top Layer to Bottom Layer, 13 vias
v3: diameter 0.6, hole 0.3, Top Layer to Bottom Layer, tented top, 11 vias
v4: diameter 2, hole 1, Top Layer to Bottom Layer, 5 vias
v5: diameter 2, hole 1, Top Layer to Bottom Layer, tented top, 2 vias
v6: diameter 1, hole 0.5, Top Layer to Bottom Layer, tented top, 2 vias
v7: diameter 1.5, hole 0.7, Top Layer to Bottom Layer, 1 vias
v8: diameter 1.5, hole 0.75, Top Layer to Bottom Layer, 1 vias
v9: diameter 1.5, hole 1, Top Layer to Bottom Layer, 1 vias

## Nets (pads, with @x,y where several pads share a name; then routed paths per layer and width w, separated by ;. In a path a pad name is that pad's centre, name@x,y a point inside that pad or via, vN(x,y) a via of type N, cw(c..) or ccw(c..) an arc to the next point about the centre after c; other vN are vias at no path point)
5V: D2.1 | length 2.2
  Top Layer w0.3: v8(11.2,77.05) v8@11.25,77
  Top Layer w0.5: v8@11.2,77 D2.1
+3V3: 3V3.1 +3V3.1 C3.2 C5.1 C6.2 C7.2 C8.2 C9.2 C10.2 H3.1 H3.2 R9.2 R10.2 R11.2 R12.2 R13.2 R20.1 U1.1 U1.7 U1.18 U1.45 U1.58 U3.5 | length 48.5
  Top Layer w0.15: v2(32.5,58) 32.75,58.25 U1.1 ; v2@33.034,55.61 33.394,55.25 U1.7@34.035,55.25 ; v2(35.5,47) 35.81,47 36.75,47.94 U1.18 ; U1.58 39.25,58.75 v3(39.7,58.3) ; v3(43.5,56.25) 43.5,56.5 43.75,56.75 U1.45
  Top Layer w0.3: 3V3.1@30.45,75.45 3V3.1 ; v2@32.915,55.585 v2(32.915,55.61) v2@33.034,55.61 ; v1(33.5,18.5) R20.1 ; +3V3.1 v1(40,76.5) ; R9.2 R10.2 ; R11.2 v1(64.75,55.75) ; R12.2 v1(69.25,55.75) R13.2 ; H3.1 73,67.8 C3.2
  Top Layer w0.381: H3.2 71.795,76.845 72.45,77.5 v1(73.5,77.5)
  Top Layer w0.5: U3.5 3V3.1@30.45,75.45 ; C5.1@27.5,73.75 v1(27.5,75.45)
  Bottom Layer w0.15: C6.2 32,57.5 v2(32.5,58) ; C8.2 43.5,55.3 v3(43.5,56.25)
  Bottom Layer w0.3: C10.2 32.805,55.5 v2(32.915,55.61) ; C7.2 v2(35.5,47) ; C9.2 v3(39.7,58.3)
  other v1: 56,55.75 74,66.8
+5V: "BAT REG OUT.1" D3.1 D4.3 H9.1 H9.5 H10.1 H10.5 H11.1 H11.5 R46.1 R47.2 R48.2 VR1.3 | length 27.6
  Top Layer w0.3: v1(55,7) 55.5,7 H11.1 ; R48.2 v1(63,19) ; H11.5 62.5,7 v1(63,7) ; R46.1 v1(66,38) ; R47.2 v1(68,23.5) ; D4.3 v7(80.05,41.05) ; v1(78,13.5) 78,14 H10.1 ; v1(78,21.5) 78,21 H10.5 ; v1(78,29) 78,29.5 H9.1 ; v1(78,37) 78,36.5 H9.5
  Top Layer w0.5: D3.1 v4(34.5,13.6)
  Top Layer w0.7: VR1.3 4.5,47.84 v4(4.5,50.8) ; v4@5.5,53.5 8.5,53.5
  other v4: 5.46,53.5
"BAT V": "BAT V.1" C20.2 pad.2 R18.2 VR1.1 | length 37.4
  Top Layer w0.3: v4@9.5,45.92 v4@9.54,45.96
  Top Layer w0.7: C20.2 4.4,25.9 5.331,24.969 pad.2@5.95,24.969 ; pad.2 6.009,24.9 v5(9.5,24.9) 12.8,24.9 12.8,26.85 13.7,27.75 R18.2@15.25,27.75 ; v4(9.5,45) v4@9.5,45.92 ; v4@9.54,45.96 VR1.1
  Bottom Layer w0.7: v5(9.5,24.9) v4(9.5,45)
"BATTERY ADC": ADC.1 C19.2 R18.1 R19.2 U1.9 | length 36.5
  Top Layer w0.15: v1(31.5,53.5) 32.644,53.5 33.36,54.215 U1.9@34.815,54.215
  Top Layer w0.3: C19.2 C19.2@17,32.2 ; ADC.1@20.625,34.125 ADC.1
  Top Layer w0.5: ADC.1 v1(21.25,37.25)
  Top Layer w0.7: C19.2 18.75,32.25 19.375,32.875 ADC.1@20.625,34.125 ; R18.1 17,30.25 C19.2@17,32.2
  Bottom Layer w0.5: v1(21.25,37.25) 21.25,38.75 31.5,49 v1(31.5,53.5)
ERASE: ERASE.1 U1.55 | length 10.2
  Top Layer w0.15: U1.55@40.7,60.3 40.7,60.783 41.5,61.583
  Top Layer w0.3: ERASE.1 40,67.5 41.5,66 41.5,61.583
GND: C1.1 C2.1 C3.1 C4.2 C5.2 C6.1 C7.1 C8.1 C9.1 C10.1 C11.1 C12.1 C13.1 C14.1 C15.1 C16.1 C18.1 C19.1 C20.1 C21.1 C22.1 C23.1 C24.1 C25.1 C26.1 C27.1 C30.1 C31.1 C32.1 Gnd2.1 Gnd.1 H1.5 H1.6 H1.7 H1.8 H1.9 H2.2 H2.6 H2.8 H3.4 H3.6 H3.8 H3.10 H3.12 H3.14 H3.16 H3.18 H3.20 H7.4 H7.5 H7.6 H9.4 H10.4 H11.4 pad.1 Q1.2 Q2.2 Q3.2 R1.2 R2.2 R4.2 R15.1 R19.1 R38.1 R39.2 R40.2 R41.2 R42.1 R45.2 SW1.2 SW2.2 U1.2 U1.17 U1.40 U1.46 U1.50 U1.60 U2.1 U3.2 U3.4 VR1.2 | length 202.5
  Top Layer w0.15: v2(32.5,56.75) 32.5,57 33.25,57.75 U1.2 ; v2@32.865,48.365 v2(32.865,48.235) 35.735,48.235 36.25,48.75 U1.17 ; v3(38.25,58.5) U1.60 ; v3@42.7,53.3 43.65,54.25 U1.40@45.15,54.25 ; U1.50@43.219,60.056 43.219,61.719 v2(43.5,62) ; v3(43.5,57.5) 43.75,57.25 U1.46
  Top Layer w0.3: H1.7@2.75,57.55 H1.6@8.25,57.55 ; H1.9@2.75,66.45 H1.8@8.25,66.45 ; H1.5@8.35,60.4 v1(11.1,60.4) ; v1(12,51.5) Gnd.1 ; C19.1@15.5,32.2 C19.1 ; v9(20.05,73.325) C4.2 ; SW1.2 v1(21.5,56) ; R15.1 23,71.125 23.375,71.5 v1(24.5,71.5) 24.5,73.5 ; U3.2 24,74.5 24.5,74 24.5,73.5 ; v1(25,50.5) R40.2 ; U3.4 24.55,73.55 24.5,73.5 ; R39.2 R40.2 ; R41.2 R40.2 ; v1(27.5,70.5) C5.2 ; C21.1 v1(40.8,17.3) ; v1(40.405,19.595) U2.1 ; R1.2 42,75.5 42.5,76 44.5,76 45,75.5 R4.2 ; v3(42.7,53.265) v3@42.7,53.3 ; R2.2 v1(43.5,76) ; H3.20@48.704,74.461 48.9,74.657 48.9,77.1 49.3,77.5 51.15,77.5 51.55,77.1 51.55,74.767 H3.18@51.244,74.461 ; v1(52.5,15) R42.1 ; H3.16@53.85,74.371 54.05,74.571 54.05,77.1 54.361,77.411 56.239,77.411 56.55,77.1 56.55,74.531 H3.14@56.39,74.371 ; v1(58.5,44.5) SW2.2 ; H3.12@59.175,74.461 59.175,77.125 59.55,77.5 61.3,77.5 61.715,77.085 H3.10@61.715,74.461 ; H11.4 60.2,6.05 C32.1 C27.1 ; Q3.2 60.2,14.7 C26.1 C27.1 ; v1(62,10.5) C27.1 ; H3.8 64.175,77.075 64.6,77.5 66.3,77.5 66.715,77.085 H3.6 ; v1(69.126,77.5) 69.126,74.59 H3.4 H3.4@69.5,74.706 ; Q2.2@70.5,19 Q2.2 74.25,18.95 C25.1 ; Q1.2@70.5,34.5 Q1.2 70.8,34.2 C22.1 C23.1 ; v1(71.5,12) R45.2 ; v1(71.5,27.5) R38.1 ; v1(74.5,20.5) C25.1 ; v1(74.5,36) C23.1 ; C3.1 Gnd2.1@81,65.5 ; H10.4 78.95,18.7 C31.1 C25.1 ; H9.4 78.95,34.2 C30.1 C23.1 ; H2.2 80.406,47.5 80.906,47 H2.2@81.406,47.5 ; H2.2@79.961,47.135 v1(82.635,47.135) ; H2.6@79.961,51.635 v1(82.635,51.635) ; H2.8@79.961,54.175 v1(82.675,54.175) ; C18.1 v1(82.5,43)
  Top Layer w0.5: H7.4 H7.5 H7.6 v1(40.25,9.75)
  Top Layer w0.7: C20.1 4.4,28.845 pad.1@5.555,30 ; pad.1 5.912,30 pad.1@5.555,30 ; VR1.2 3.2,33.65 3.2,31.6 v5(3.2,30.4) 3.6,30 pad.1@5.555,30 ; v4(13.4,30.25) R19.1@15.5,30.25 ; C19.1@15.5,32.2 R19.1@15.5,30.25 ; R19.1 R19.1@15.5,30.25
  Bottom Layer w0.15: C12.1 v3(40,52.5) ; C11.1 40,54.5 ; C8.1 40,54.5 ; C14.1 41.7,56 41,56 40.75,55.75 v3(40.5,55.75) 40,55.25 40,54.5 ; C13.1 v3(42.7,53.265)
  Bottom Layer w0.3: C16.1 20.3,57.2 v1(21.5,56) ; v2(28.5,57.5) C6.1 ; v2(29,55.5) 30.8,55.5 ; v1(30.5,61.5) C15.1 ; C7.1 32.8,48.17 v2(32.865,48.235) ; C1.1 36.5,74 37,74.5 38,74.5 38.5,74 C2.1 ; v3(38.25,58.5) 38.25,57.05 C9.1
  other v1: 78.5,65.5 37.5,74.5 50.2,77.5 55.25,77.5 60.4,77.5 65.45,77.5
  other v6: 5.5,57.5 5.5,66.5
LED1: DL1.2 U1.48 | length 16.1
  Top Layer w0.15: U1.48@45.525,58.2 48.1,58.2
  Top Layer w0.3: DL1.2 48.4,62.5 48.4,58.5 48.1,58.2
LED2: DL2.2 U1.47 | length 16.7
  Top Layer w0.15: U1.47@45.934,57.785 48.785,57.785
  Top Layer w0.3: DL2.2 49.5,62.9 49.5,58.5 48.785,57.785
LED3: DL3.2 U1.44 | length 18.2
  Top Layer w0.15: U1.44 48.25,56.25
  Top Layer w0.3: DL3.2@45.35,68.65 50.5,63.5 50.5,58.5 48.25,56.25
LED4: DL4.2 U1.13 | length 3
  Top Layer w0.15: DL4.2 33.201,52 33.451,52.25 U1.13
LED5: DL5.2 U1.14 | length 3.4
  Top Layer w0.15: DL5.2 32.8,51.7 33.325,51.7 33.375,51.75 U1.14
LED6: DL6.2 U1.15 | length 4.5
  Top Layer w0.15: DL6.2 32.25,49 32.5,49.25 32.5,50.371 33.379,51.25 U1.15
NetC1_2: C1.2 U1.62 Y1.2 | length 15.4
  Top Layer w0.15: v2(37,62.5) 37,61.31 37.25,61.06 U1.62
  Bottom Layer w0.3: Y1.2 36,68 ; C1.2 36.5,68.5 36,68 ; v2(37,62.5) 36.813,62.687 36.813,67.187 36,68
NetC2_2: C2.2 U1.61 Y1.1 | length 15.6
  Top Layer w0.15: v2(37.525,63.975) 37.525,61.285 37.75,61.06 U1.61
  Bottom Layer w0.3: v2(37.525,63.975) 37.525,66.525 39,68 ; C2.2 38.5,68.5 39,68 ; Y1.1 39,68
NetC4_1: C4.1 D2.3 L1.2 U3.1 U3.3 | length 14
  Top Layer w0.381: U3.3 22.175,73.55 21.5,74.225 21.5,75.325 C4.1 21.525,75.45 U3.1
  Top Layer w0.5: D2.3 16.5,76.5 17,76 ; 17,75 17,76 ; C4.1 21.45,76.075 21.45,76.175 21.125,76.5 17.5,76.5 17,76
NetC15_2: C15.2 L2.1 R16.2 U1.64 | length 18.6
  Top Layer w0.15: v1(35.5,61.5) 36,61.5 36.25,61.25 U1.64
  Bottom Layer w0.3: R16.2 26.5,59.5 ; L2.1 26.5,59.5 ; C15.2 v1(35.5,61.5) ; 35.5,62 35,62.5 27.5,62.5 26.5,61.5 26.5,59.5
NetC16_2: C16.2 R16.1 | length 2.4
  Bottom Layer w0.3: C16.2 20.7,59.5 R16.1
NetC18_2: C18.2 D4.1 H2.1 | length 9.4
  Top Layer w0.3: 75.115,43 C18.2 ; H2.1 75.115,41.985 75.55,41.55 D4.1
NetC21_2: C21.2 R20.2 U2.3 | length 6
  Top Layer w0.3: R20.2 38.8,18.5 C21.2 ; 37.5,18.5 37.865,18.865 U2.3
NetC22_2: C22.2 C23.2 C30.2 D5.1 H9.3 Q1.3 R46.2 | length 16.3
  Top Layer w0.3: R46.2 67.25,33.5 Q1.3 71.082,33.5 71.782,32.8 C22.2 C23.2 ; D5.1 74.5,30.85 C23.2 ; H9.3 78.8,32.8 C30.2 C23.2
NetC24_2: C24.2 C25.2 C31.2 D6.1 H10.3 Q2.3 R47.1 | length 15.8
  Top Layer w0.3: R47.1 68,18.45 Q2.3 71.082,18 71.682,17.4 74.4,17.4 C25.2 ; D6.1 74.5,15.35 C25.2 ; H10.3 78.8,17.3 C31.2 C25.2
NetC26_2: C26.2 C27.2 C32.2 D7.1 H11.3 Q3.3 R48.1 | length 15.9
  Top Layer w0.3: D7.1 56.85,10.5 C27.2 ; H11.3 58.8,6.2 C32.2 C27.2 ; R48.1 59.5,18.75 Q3.3 59.5,14.418 58.8,13.718 C26.2 C27.2
NetD1_1: D1.1 H1.1 | length 4.9
  Top Layer w0.5: H1.1@8.35,63.6 10.6,63.6 11.5,64.5 D1.1
NetD3_3: D3.3 H7.1 H7.2 H7.3 | length 5.8
  Top Layer w0.5: D3.3 H7.1 H7.2 H7.3
NetD5_3: D5.3 H9.2 | length 3.6
  Top Layer w0.3: D5.3 77.9,31.75 H9.2
NetD6_3: D6.3 H10.2 | length 3.6
  Top Layer w0.3: D6.3 77.9,16.25 H10.2
NetD7_3: D7.3 H11.2 | length 3.6
  Top Layer w0.3: D7.3 57.75,7.1 H11.2
NetDL1_1: DL1.1 R1.1 | length 2.3
  Top Layer w0.3: DL1.1 42,72.15 R1.1
NetDL2_1: DL2.1 R2.1 | length 2.3
  Top Layer w0.3: DL2.1 43.5,72.15 R2.1
NetDL3_1: DL3.1 R4.1 | length 2.3
  Top Layer w0.3: DL3.1 45,72 R4.1
NetDL4_1: DL4.1 R41.1 | length 1.8
  Top Layer w0.3: R41.1 DL4.1
NetDL5_1: DL5.1 R40.1 | length 1.8
  Top Layer w0.3: R40.1 DL5.1
NetDL6_1: DL6.1 R39.1 | length 1.8
  Top Layer w0.3: R39.1 DL6.1
NetH5_1: H5.1 R27.2 | length 3.9
  Top Layer w0.3: R27.2 14.5,8 H5.1
NetH5_2: H5.2 R28.2 | length 3.6
  Top Layer w0.3: R28.2 16.5,9.5 17.25,8.75 H5.2
NetH5_3: H5.3 R29.2 | length 3.2
  Top Layer w0.3: H5.3 R29.2
NetH5_4: H5.4 R30.2 | length 3.6
  Top Layer w0.3: H5.4 19.75,8.25 20.5,9 R30.2
NetH5_5: H5.5 R31.2 | length 3.9
  Top Layer w0.3: H5.5 21,7.55 21.05,7.55 22.5,9 R31.2
NetQ1_1: Q1.1 R37.2 R38.2 | length 6.2
  Top Layer w0.3: R37.2 70.5,32.5 71,32.5 71.5,32 R38.2
NetQ2_1: Q2.1 R44.2 R45.1 | length 13.6
  Top Layer w0.3: R44.2 64.5,19.5 69,15 71.5,15 R45.1 71.5,16.1 Q2.1 Q2.1@70.5,17
NetQ3_1: Q3.1 R42.2 R43.2 | length 4.2
  Top Layer w0.3: R43.2 56.25,16.5 R42.2 58.5,15 Q3.1
NetR3_1: R3.1 U1.19 | length 11.5
  Top Layer w0.15: R3.1 36.5,46 37.25,46.75 U1.19
NetR3_2: R3.2 SW1.1 | length 5.7
  Top Layer w0.15: SW1.1 22.5,46 R3.2
NetR5_2: R5.2 U1.57 | length 2.5
  Top Layer w0.15: R5.2 39,61.5 39.75,60.75 U1.57
NetR6_2: R6.2 U1.56 | length 2.3
  Top Layer w0.15: U1.56 40.25,61.06 40.5,61.31 R6.2
NetR7_2: R7.2 R8.2 U1.31 | length 31.8
  Top Layer w0.15: U1.31 43.25,47.75 43.5,47.5 44.5,47.5
  Top Layer w0.3: 44.5,47.5 64.5,47.5 v1(65,48) ; R8.2 65.75,51.25 v1(66.5,52) 66.5,52.5 66.75,52.75 R7.2
  Bottom Layer w0.3: v1(65,48) 66.5,49.5 v1(66.5,52)
NetR21_2: R21.2 U2.4 | length 5.1
  Top Layer w0.3: U2.4 36.75,22.155 R21.2
NRST: H3.15 nRST.1 R9.1 SW2.1 U1.39 | length 35.2
  Top Layer w0.15: U1.39 49.25,53.75
  Top Layer w0.3: 49.25,53.75 50.5,52.5 v1(52,52.5) 57.5,52.5 SW2.1 ; v1(52,57) 52,59 52.5,59.5 54,59.5 ; R9.1@54,57.5 54,59.5 ; H3.15 55.285,66.785 54,65.5 nRST.1 54,59.5
  Bottom Layer w0.3: v1(52,52.5) v1(52,57)
P25: R27.1 U1.25 | length 48.4
  Top Layer w0.15: 40.25,46.75 U1.25
  Top Layer w0.3: R27.1 14.5,19.5 40,45 40,46.5 40.25,46.75
P26: R28.1 U1.26 | length 47.8
  Top Layer w0.15: 40.75,46.3 U1.26
  Top Layer w0.3: R28.1 16.5,19.5 40.75,43.75 40.75,46.3
P27: R29.1 U1.27 | length 47.4
  Top Layer w0.15: U1.27 41.25,45.75 41.5,45.5
  Top Layer w0.3: R29.1 18.5,20 41.469,42.969 41.469,45.469 41.5,45.5
P28: R30.1 U1.28 | length 46.8
  Top Layer w0.15: U1.28 41.75,46.25 42,46
  Top Layer w0.3: R30.1 20.5,20 42.031,41.531 42.031,45.969 42,46
P29: R31.1 U1.29 | length 46.5
  Top Layer w0.15: U1.29 42.25,46.75 43,46
  Top Layer w0.3: R31.1 22.5,20.5 43,41 43,46
PWMH1: PWMH1.1 R37.1 U1.23 | length 33.8
  Top Layer w0.15: U1.23 39.25,47.94 39.5,47.69 v2(39.5,47)
  Top Layer w0.3: v1(49.5,40.5) 57.5,32.5 PWMH1.1 R37.1
  Bottom Layer w0.3: v2(39.5,47) 46,40.5 v1(49.5,40.5)
PWMH2: PWMH2.1 R44.1 U1.22 | length 40.5
  Top Layer w0.15: U1.22 38.75,45.75 v2(39,45.5)
  Top Layer w0.3: v1(47.5,39) 47.5,38.5 59.5,26.5 PWMH2.1 R44.1
  Bottom Layer w0.3: v2(39,45.5) 45.5,39 v1(47.5,39)
PWMH3: PWMH3.1 R43.1 U1.21 | length 39.2
  Top Layer w0.15: 38.25,46.75 U1.21
  Top Layer w0.3: v2(38,44.5) 38,46.5 38.25,46.75 ; v1(46,37.5) 56,27.5 PWMH3.1 R43.1
  Bottom Layer w0.3: v2(38,44.5) 38,44 44.5,37.5 v1(46,37.5)
SCL: H2.5 R7.1 U1.36 | length 30.6
  Top Layer w0.15: U1.36@46.069,52.215 47.785,52.215
  Top Layer w0.3: 47.785,52.215 49.635,50.365 H2.5@75.039,50.365 ; 68,50.365 R7.1
SDA: H2.7 R8.1 U1.43 | length 31.4
  Top Layer w0.15: U1.43 47.75,55.75
  Top Layer w0.3: 47.75,55.75 49,54.5 61,54.5 62,53.5 65,53.5 ; R8.1 65,53.5 ; H2.7@75.039,52.905 74.444,53.5 65,53.5
TCK: H3.9 R11.1 TCK.1 U1.53 | length 36.2
  Top Layer w0.15: 41.75,58.75 U1.53
  Top Layer w0.3: 41.75,58.75 42,58.5 44,58.5 45,59.5 v1(46.5,59.5) ; R11.1@62.5,57.5 TCK.1 TCK.1@62.905,62.405
  Top Layer w0.381: TCK.1 62.5,65.79 62.905,66.195 H3.9
  Bottom Layer w0.3: v1(46.5,59.5) 52,59.5 53.341,58.159 59.659,58.159 60.5,59 v1(62.5,59)
TDI: H3.5 R13.1 TDI.1 U1.33 | length 51.1
  Top Layer w0.15: U1.33 46.25,50.75 47,50
  Top Layer w0.3: 47,50 48,49 v1(70.5,49) ; H3.5 68.05,69.474 68.05,66.8 68.8,66.05 70.95,66.05 71.5,65.5 TDI.1 R13.1
  Bottom Layer w0.3: v1(70.5,49) 71.5,50 v1(71.5,59)
TDO: H3.13 R10.1 TDO.1 U1.49 | length 30.1
  Top Layer w0.15: U1.49 43.75,61.25
  Top Layer w0.3: 43.75,61.25 44,61.5 v1(46.5,61.5) ; H3.13 57.825,62.175 TDO.1 R10.1
  Bottom Layer w0.3: v1(46.5,61.5) 57.5,61.5 58,61 v1(58,59)
TMS: H3.7 R12.1 TMS.1 U1.51 | length 41.7
  Top Layer w0.15: U1.51 42.75,62.25
  Top Layer w0.3: 42.75,62.25 43.5,63 v1(46.5,63) ; H3.7 65.445,66.555 67,65 TMS.1 v1(67,59) ; R12.1 v1(67,59)
  Bottom Layer w0.3: v1(46.5,63) 63.5,63 67,59.5 v1(67,59)
URXD0: R21.1 U1.30 URXD0.1 | length 26.5
  Top Layer w0.15: U1.30 42.75,47.25 44,46
  Top Layer w0.3: R21.1 38.5,27 URXD0.1 41,37.5 44,40.5 44,46
"USB DETECT": R14.1 R15.2 U1.35 | length 31.8
  Top Layer w0.3: R14.1 R15.2 26.65,64.5 v1(27,64.5) ; v1(31,63.5) 42.75,51.75 U1.35
  Bottom Layer w0.3: v1(27,64.5) 30,64.5 v1(31,63.5)
USB_N: H1.2 R6.1 USB_N.1 | length 38.5
  Top Layer w0.3: H1.2@8.35,62.8 15.5,62.8 ; USB_N.1 15.5,62.8 ; R6.1 40.5,65.5 39.5,66.5 31.102,66.5 27.402,62.8 15.5,62.8
USB_P: H1.3 R5.1 USB_P.1 | length 36.4
  Top Layer w0.3: H1.3@8.35,62 15.5,62 ; USB_P.1 15.5,62 ; R5.1 39,65 38.135,65.865 31.365,65.865 27.5,62 15.5,62
VBUS: D1.3 L1.1 R14.2 V_bus.1 | length 16.1
  Top Layer w0.5: D1.3 12,68.5 12.5,69 ; V_bus.1 13,69.5 12.5,69 ; L1.1 17,69.5 ; R14.2 17.35,69.85 17,69.5 ; 12.5,69 16.5,69 17,69.5
VDDOUT: C11.2 C12.2 C13.2 C14.2 L2.2 U1.8 U1.12 U1.24 U1.54 VddOut.1 | length 42.4
  Top Layer w0.15: VddOut.1@27,54.5 33,54.5 33.25,54.75 U1.8 ; U1.12 35.75,52.75 v3(36,52.5) ; U1.8@34.475,54.715 35.785,54.715 ; v3(39.5,51) 39.5,50.26 39.75,50.01 U1.24 ; v3(40.76,58.5) 41.25,58.99 U1.54
  Bottom Layer w0.15: v3@36,52.662 36.162,52.5 C12.2 ; 36,56 40,56 41,57 41,57.5 ; v3(36.035,54.5) C11.2 ; v3(40.76,58.5) 40.76,57.74 41,57.5 ; C14.2 41.8,57.5 41,57.5
  Bottom Layer w0.3: 31.5,59.5 35,59.5 36,58.5 36,56 36,52.662 v3(36,52.5) 36,52 37,51 v3(39.5,51) ; v3@39.517,51.017 40,51.5 C13.2
pads on no net: D1.2 D2.2 D3.2 D4.2 D5.2 D6.2 D7.2 H1.4 H1.MH1 H1.MH2 H2.3 H2.4 H2.9 H2.10 H3.3 H3.11 H3.17 H3.19 H5.M H7.M H9.M H10.M H11.M MT1.1 MT2.1 MT3.1 MT4.1 U1.3 U1.4 U1.5 U1.6 U1.10 U1.11 U1.16 U1.20 U1.32 U1.34 U1.37 U1.38 U1.41 U1.42 U1.52 U1.59 U1.63 U2.2

## Polygon pours and split planes (outlines as drawn)
GND on Gnd (split plane): 84.49,0.51 0.51,0.51 0.51,79.49 84.49,79.49
+5V on DC Power (split plane): 16.371,77.946 16.371,72.554 8.033,64.217 8.005,64.175 7.996,64.125 7.996,22.375 8.005,22.325 8.033,22.283 14.908,15.408 14.95,15.38 15,15.371 40.5,15.371 40.55,15.38 40.592,15.408 45.554,20.371 58,20.371 58.05,20.38 58.092,20.408 63.592,25.908 63.62,25.95 63.629,26 63.629,43.871 83.446,43.871 83.571,43.746 83.571,1.429 1.5,1.429 1.5,78.371 15.946,78.371
+3V3 on DC Power (split plane): 84.49,0.51 0.51,0.51 0.51,79.49 84.49,79.49

## Keep-outs
Keep-Out Layer:
  lines w0.3: 1.3,1.3 83.7,1.3 83.7,78.7 1.3,78.7

## Other copper
DC Power (plane layer: these items are gaps in the copper):
  lines w0.254: 1.371,78.5 16,78.5 16.5,78 16.5,72.5 8.125,64.125 8.125,22.375 15,15.5 40.5,15.5 45.5,20.5 58,20.5 63.5,26 63.5,44 83.5,44 83.7,43.8 83.7,1.3 1.3,1.3 1.371,1.371 1.371,78.7

## Silkscreen, mask and mechanical layers (free items; w line width, h text height)
Top Overlay:
  lines w0.203: 2.145,22.8 10.561,22.8 10.561,32.267 2.145,32.267 2.145,22.8
  text "group4" at 18.5,41.5 h1.52
  text "motor_board" at 15,39 h1.52
  text "AB & TB" at 24.1,36 h1.52
  text "BAT HEADER" at 2.3,20.7 h1.97
Mechanical 2:
Mechanical 4:
PCB Boundary:
  lines w0.254: 1.3,1.3 1.3,51.8 ; 1.3,71.2 1.3,78.7
  lines w0.3: 0,0 0,80 85,80 85,0 0,0
Drill Drawing:
  text ".LEGEND" at -32.62,15.78 h1.52
  text "Drill Drawing." at -32.62,13.24 h1.52

## Dimensions
0,0 to 0,80 on Dimension
0,0 to 85,0 on Dimension

## Text inside footprints (layer, text, board x,y; h text height)
H1: Dimension "PCB Edge" at -0.432,66.036 h0.25 r270